# EAGLE board Load_Testbed (EAGLE 9.6.2)
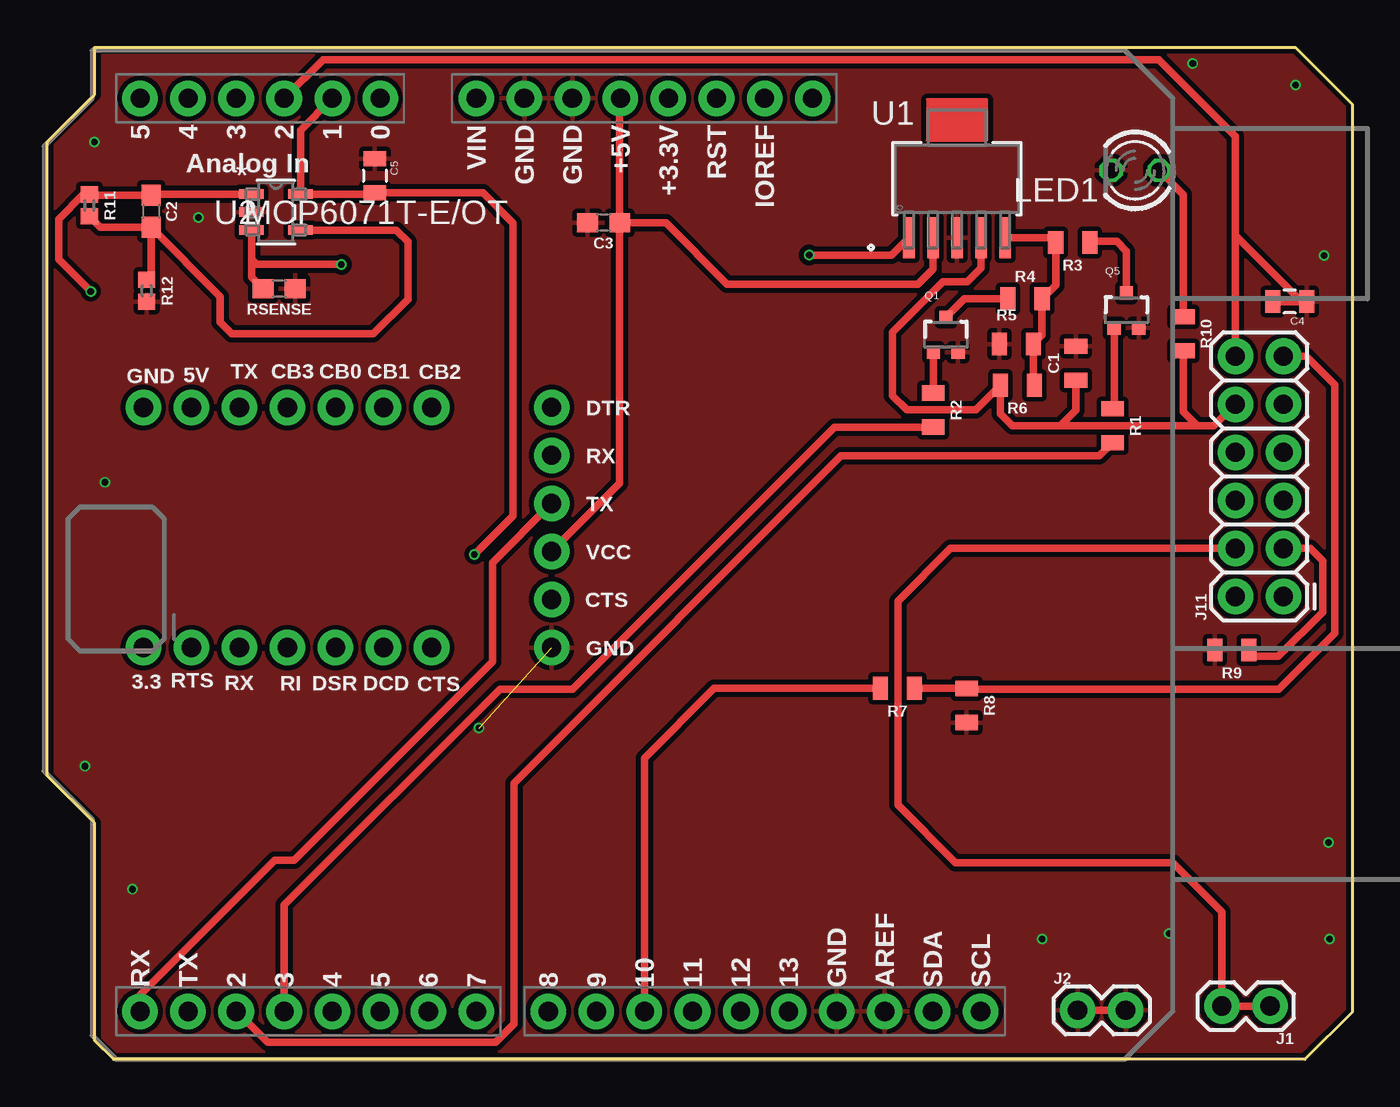
[diagram p0: board, top side]
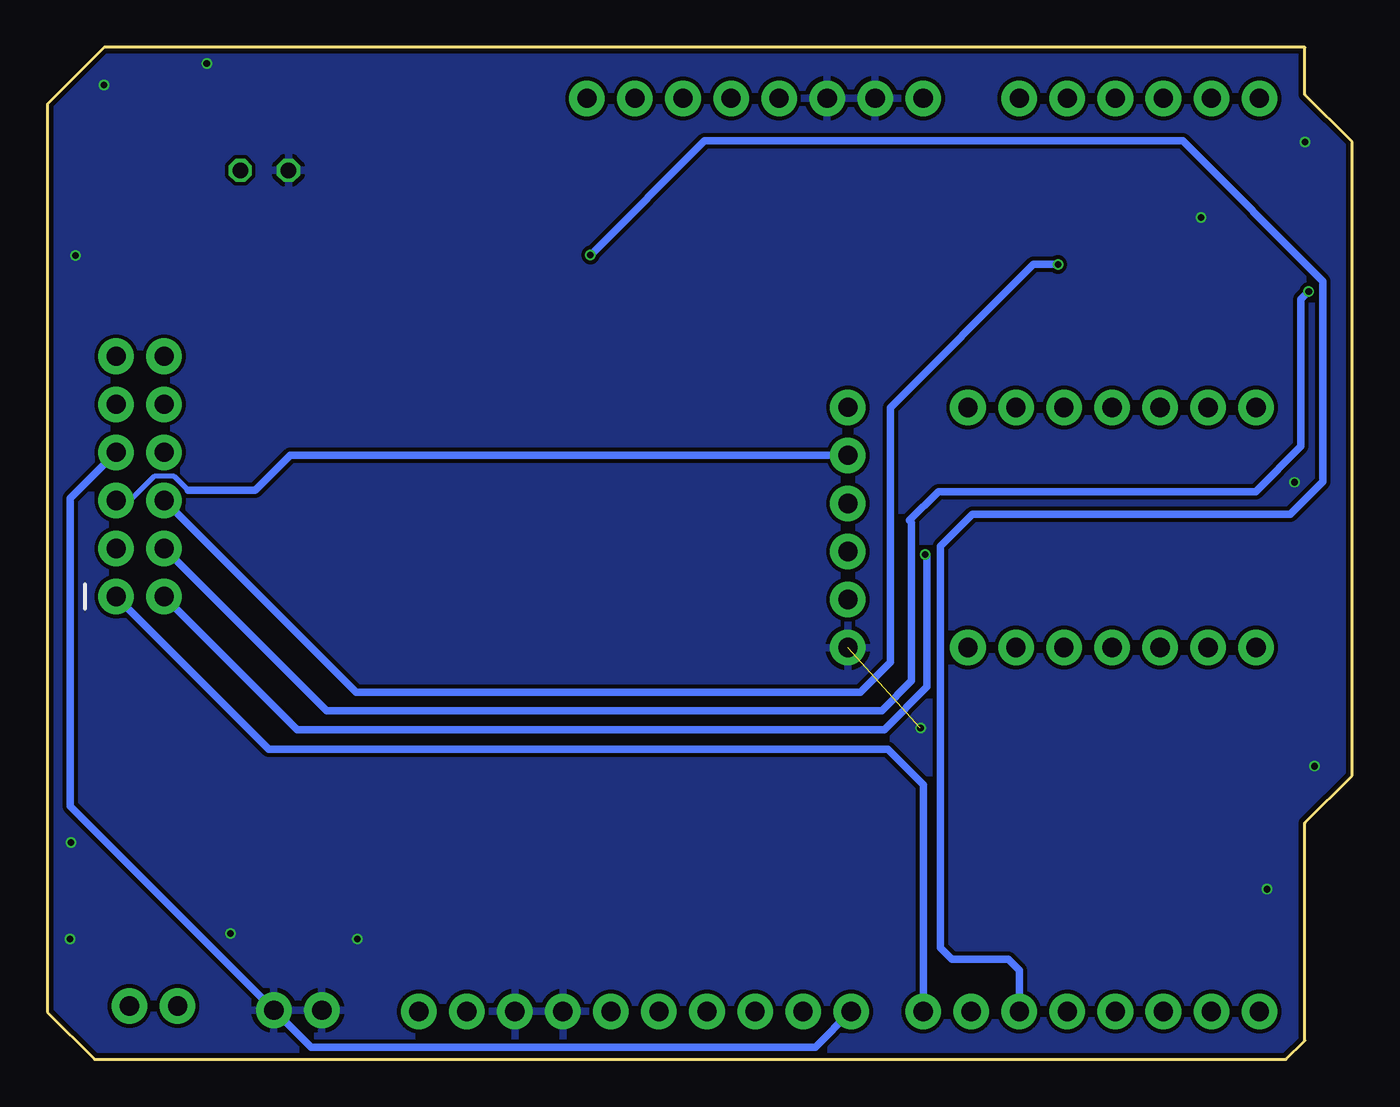
[diagram p1: board, bottom side, seen from below]

Size 69 x 53.5 mm. Coordinates in mm from the lower left corner, seen from the top.
Outline: 3.5,0 2.5,1 2.5,12.5 0,15 0,48.5 2.5,51 2.5,53.5 66,53.5 69,50.5 69,2.5 66.5,0 3.5,0
Copper layers (1*2*15*16): Top 0.035mm / dielectric 1.5mm / GND 0.035mm / dielectric 0.15mm / PWR 0.035mm / dielectric 0.2mm / Bottom 0.035mm
Design rules "Fusion_eagle_rule_v1.1 *": minimum track width 10mil, minimum drill 12mil, track to track 8mil, track to pad 8mil, pad to pad 8mil, via to via 8mil, smd to smd 0mil, copper to edge 10mil, drill to drill 8mil, minimum pad ring 6mil, minimum via ring 4mil, stop-mask expansion 4mil, vias tented up to drill 25mil, thermal gap 10mil

## Footprints (pad centres in the part's own frame; a part is rotated, then mirrored left to right if it is on the bottom)
0805 = smd 0.8 x 1.2: 1 -0.9,0; 2 0.9,0
0603 = smd 1.1 x 1: 1 -0.85,0; 2 0.85,0
1X02 = drill 1.016 pad 1.88: 1 0,0; 2 2.54,0
2X6 = drill 1.016 pad 1.88: 1 0,0; 2 0,2.54; 3 2.54,0; 4 2.54,2.54; 5 5.08,0; 6 5.08,2.54; 7 7.62,0; 8 7.62,2.54; 9 10.16,0; 10 10.16,2.54; 11 12.7,0; 12 12.7,2.54
1X06_NO_SILK = drill 1.016 pad 1.88: 1 0,0; 2 2.54,0; 3 5.08,0; 4 7.62,0; 5 10.16,0; 6 12.7,0
1X07_NO_SILK = drill 1.016 pad 1.88: 1 0,0; 2 2.54,0; 3 5.08,0; 4 7.62,0; 5 10.16,0; 6 12.7,0; 7 15.24,0
LED3MM = drill 0.813 octagon: A -1.27,0; K 1.27,0
SOT323 = smd 0.7 x 0.7: 1 -0.65,-0.925; 2 0.65,-0.925; 3 0,0.925
0402 = smd 0.85 x 0.9: 1 -0.58,0; 2 0.58,0
SOT-223_5MC_MCH-M = smd 0.61 x 2.159: 1 -2.54,-3.109; 2 -1.27,-3.109; 3 0,-3.109; 4 1.27,-3.109; 5 2.54,-3.109
SOT-23-5_MC_MCH = smd 1.31 x 0.508: 1 -1.295,0.95; 2 -1.295,0; 3 -1.295,-0.95; 4 1.295,-0.95; 5 1.295,0.95
UNO_R3_SHIELD = drill 1.016 pad 1.88: 3.3V 50.8,26.67; 5V 50.8,29.21; A0 50.8,41.91; A1 50.8,44.45; A2 50.8,46.99; A3 50.8,49.53; A4 50.8,52.07; A5 50.8,54.61; AREF 2.54,15.24; D2 2.54,49.53; D3 2.54,46.99; D4 2.54,44.45; D5 2.54,41.91; D6 2.54,39.37; D7 2.54,36.83; D8 2.54,33.02; D9 2.54,30.48; D10 2.54,27.94; D11 2.54,25.4; D12 2.54,22.86; D13 2.54,20.32; GND@0 50.8,31.75; GND@1 50.8,34.29; GND@2 2.54,17.78; IOREF 50.8,21.59; NC 50.8,19.05; RES 50.8,24.13; RX 2.54,54.61; SCL 2.54,10.16; SDA 2.54,12.7; TX 2.54,52.07; VIN 50.8,36.83

## Placement (x,y rotation side)
C1  1.0uF  [0805]  54.39,36.8 90 top
C2  0.1uF  [0603]  5.49,44.83 270 top
C3  4.7uF  [0603]  29.42,44.23 180 top
C4  100n  [0805]  65.7,40.06 180 top
C5  100n  [0805]  17.32,46.71 270 top
J1  [1X02]  64.65,2.82 180 top
J2  [1X02]  54.48,2.6 0 top
J11  2X6 FEMALE  [2X6]  65.36,24.47 90 top
JP1  [1X06_NO_SILK]  26.67,21.77 90 top
JP5  [1X07_NO_SILK]  5.08,34.46 0 top
JP6  [1X07_NO_SILK]  5.08,21.77 0 top
LED1  [LED3MM]  57.52,46.99 180 top
Q1  2N7002PW  [SOT323]  47.51,38.3 0 top
Q5  2N7002PW  [SOT323]  57.06,39.59 0 top
R1  [0805]  56.33,33.5 270 top
R2  [0805]  46.85,34.33 270 top
R3  [0805]  54.22,43.19 180 top
R4  [0805]  51.7,40.21 0 top
R5  [0805]  51.24,37.81 0 top
R6  [0805]  51.3,35.64 180 top
R7  [0805]  44.96,19.62 180 top
R8  [0805]  48.61,18.71 270 top
R9  [0805]  62.64,21.64 180 top
R10  [0805]  60.07,38.36 270 top
R11  15k  [0402]  2.23,45.14 270 top
R12  1k  [0402]  5.26,40.63 270 top
RSENSE  10mR  [0603]  12.26,40.74 180 top
U1  MCP1825T-ADJE/DCSOT-223_5MC_MCH-M  [SOT-223_5MC_MCH-M]  48.1,46.55 0 top
U2  MCP6071T-E/OT  [SOT-23-5_MC_MCH]  12.09,44.79 0 top
U$4  ARDUINO_R3_SHIELD  [UNO_R3_SHIELD]  59.52,0 90 top

## Library data of the parts
C1 = SparkFun-Capacitors; PROD_ID: CAP-11625
C2 = SparkFun-Capacitors; PROD_ID: CAP-00810
C3 = SparkFun-Capacitors; PROD_ID: CAP-08280
C4 C5 = SparkFun
J1 J2 JP5 JP6 = SparkFun-Connectors
J11 = SparkFun-Connectors; PROD_ID: CONN-12423
JP1 = SparkFun-Connectors; PROD_ID: CONN-08437
LED1 = led
Q1 Q5 = SparkFun-DiscreteSemi; PROD_ID: TRANS-11151
R1-R12 RSENSE = SparkFun-Resistors
U1 = MCP1825T-ADJE; BUILT_BY: EMA_UL_Team; MANUFACTURER_PART_NUMBER: MCP1825T-ADJE/DC; SOURCELIBRARY: Microchip_2011-05-13; VENDOR: Microchip
U2 = MCP6071; BUILT_BY: EMA_Jessica; COPYRIGHT: Copyright (C) 2018 Accelerated Designs. All rights reserved; MANUFACTURER_PART_NUMBER: MCP6071T-E/OT; SOURCELIBRARY: Microchip_2019-08-23_21; VENDOR: Microchip
U$4 = SparkFun-Boards

## Nets
CTS: JP1.2
DTR: JP1.6
ENABLE_LDO: U1.1 U$4.D5
GND: C1.2 C3.2 C4.1 C5.1 J2.1 J2.2 JP1.1 LED1.K Q1.2 Q5.2 R5.1 R8.2 R9.2 R12.2 RSENSE.1 U1.3 U2.2 U$4.AREF U$4.GND@0 U$4.GND@1 U$4.GND@2
IO_SENSE: J11.9
IOSENSE: U$4.A0
ISENSE_RAW: J11.11 R7.1 R8.1
N$1: C2.2 R11.2 R12.1 U2.4
N$2: Q5.1 R1.1
N$3: Q1.1 R2.1
N$4: Q5.3 R3.1
N$5: Q1.3 R4.1
N$6: LED1.A R10.1
N$7: R3.2 R4.2 R5.2 R6.1 U1.5
N$12: R7.2 U$4.D10
RXI: J11.8
SCA_2: J11.1 U$4.D7
SCL_2: J11.7 U$4.D8
SW1: R1.2 U$4.D2
SW2: R2.2 U$4.D3
TST_MODE: J11.3 R9.1
TX0: J11.5 JP1.5
TX_FTDI: JP1.4 U$4.RX
VBUS+: C1.1 J11.10 R6.2 R10.2 U1.4
VBUS-: J11.6 RSENSE.2 U2.3
VCC: C5.2 J11.2 U2.5 U$4.A1
VCC-ISO: C3.1 JP1.3 U1.2 U$4.5V
VCC_2: C4.2 J11.12 U$4.A2
VOUTSENSE: C2.1 J1.1 J1.2 J11.4 R11.1 U2.1

## Tracks (layer width: path | path; a pad name or v marks a point on that pad's centre or on a via)
ENABLE_LDO  (via drill 0.35)
  Top 0.406: v40.28,42.52 44.64,42.52 U1.1
  Bottom 0.406: v40.28,42.52 34.25,48.55 8.97,48.55 1.56,41.14 1.56,30.53 3.27,28.82 20.08,28.82 21.78,27.12 21.78,5.91 21.16,5.29 18.18,5.29 17.61,4.72 U$4.D5
GND  (via drill 0.35)  (1 unrouted)
  Top 0.406: J2.1 J2.2
  other vias: 3.06,30.51 22.83,17.51 8,44.5 2.5,48.5 60.57,52.64 66,51.5 67.5,42.5 67.75,11.47 67.79,6.37 59.32,6.65 52.61,6.37 4.5,9 2,15.5
  pour Top (isolate 0.254): -2,55.42 -2,-2 70.85,-2 70.85,55.42
  pour Bottom: -2,55.5 -2,2 2,-2 68,-2 70.96,0.96 70.96,52.04 67.5,55.5
ISENSE_RAW
  Top 0.406: J11.11 66.58,37.17 68.09,35.66 68.09,22.53 65.13,19.57 48.65,19.57 R8.1 45.84,19.61 R7.1
N$1
  Top 0.406: R11.2 2.81,43.98 C2.2 | C2.2 5.49,41.44 R12.1 | C2.2 9.15,40.32 9.15,38.96 9.76,38.35 17.23,38.35 19.07,40.19 19.07,43.21 18.44,43.84 U2.4
N$2
  Top 0.406: Q5.1 56.41,34.48 R1.1
N$3
  Top 0.406: Q1.1 R2.1
N$4
  Top 0.406: Q5.3 57.06,42.73 56.55,43.24 55.17,43.24 R3.1
N$5
  Top 0.406: R4.1 48.5,40.21 Q1.3
N$6
  Top 0.406: LED1.A 60.07,45.71 R10.1
N$7
  Top 0.406: U1.5 53.07,43.44 R3.2 53.32,40.93 R4.2 52.6,38.27 R5.2 52.14,35.7 R6.1
N$12
  Top 0.406: R7.2 35.27,19.62 31.58,15.93 U$4.D10
SCA_2
  Bottom 0.406: U$4.D7 22.69,14.52 24.56,16.39 57.28,16.39 J11.1
SCL_2
  Bottom 0.406: J11.7 67.79,29.66 67.79,13.39 55.05,0.65 28.39,0.65 U$4.D8
SW1
  Top 0.406: R1.2 55.64,31.91 41.97,31.91 24.67,14.61 24.67,1.88 23.7,0.91 11.65,0.91 10.02,2.54 U$4.D2
SW2
  Top 0.406: R2.2 41.63,33.43 27.78,19.58 23.94,19.58 12.53,8.17 U$4.D3
TST_MODE
  Top 0.406: J11.3 66.78,27.01 67.43,26.36 67.43,23.65 65.1,21.32 63.72,21.32 63.54,21.5 R9.1
TX0
  Bottom 0.254: J11.5 64.62,29.55 63.35,30.82 62.29,30.82 61.55,30.08
  Bottom 0.406: JP1.5 56.16,31.93 58.01,30.08 61.55,30.08
TX_FTDI
  Top 0.406: U$4.RX 4.91,3.42 12.03,10.54 13.05,10.54 23.54,21.03 23.54,26.26 JP1.4
VBUS+
  Top 0.406: J11.10 61.69,33.5 60.81,33.5 | 60.81,33.5 53.58,33.5 | 53.58,33.5 51.03,33.5 50.4,34.13 R6.2 49.09,34.33 45.45,34.33 44.69,35.09 44.69,38.43 47.36,41.1 48.64,41.1 49.37,41.83 U1.4 | C1.1 54.39,34.31 53.58,33.5 | R10.2 60.07,34.24 60.81,33.5
VBUS-  (via drill 0.35)
  Top 0.406: RSENSE.2 10.8,41.35 10.8,42.3 | 10.8,42.3 U2.3 | v15.56,42.02 11.07,42.02 10.8,42.3
  Bottom 0.406: J11.6 52.68,19.41 26.01,19.41 24.43,20.99 24.43,34.46 16.87,42.02 v15.56,42.02
VCC  (via drill 0.35)
  Top 0.406: U$4.A1 13.38,49.12 U2.5 17.25,45.74 C5.2 23.03,45.81 24.63,44.21 24.63,28.74 v22.59,26.7
  Bottom 0.406: J11.2 55.8,17.44 24.74,17.44 22.49,19.69 22.49,26.6 v22.59,26.7
VCC-ISO
  Top 0.406: U1.2 46.83,41.77 46.04,40.98 35.95,40.98 32.7,44.23 C3.1 | C3.1 30.27,50.76 U$4.5V | C3.1 30.27,30.45 JP1.3
VCC_2
  Top 0.406: U$4.A2 14.58,52.85 58.78,52.85 62.82,48.81 62.82,43.56 | 62.82,43.56 66.32,40.06 C4.2 | J11.12 62.82,43.56
VOUTSENSE  (via drill 0.35)
  Top 0.406: U2.1 5.55,45.74 C2.1 2.27,45.68 R11.1 1.9,45.72 0.6,44.42 0.6,42.3 v2.3,40.6 | J11.4 47.74,27.01 44.97,24.23 44.97,13.46 48.02,10.41 59.52,10.41 62.11,7.82 J1.2 J1.1
  Bottom 0.406: J11.4 54.24,18.43 24.88,18.43 23.3,20.01 23.3,28.37 23.42,28.49 21.89,30.02 5.11,30.02 2.72,32.41 2.72,40.18 v2.3,40.6

## Text on the board
tPlace: GND | 5V | TX | CB3 | CB0 | CB1 | CB2 | DTR | RX | TX | VCC | CTS | GND | 3.3 | RTS | RX | RI | DSR | DCD | CTS